# Allegro board powerSupply_design.brd
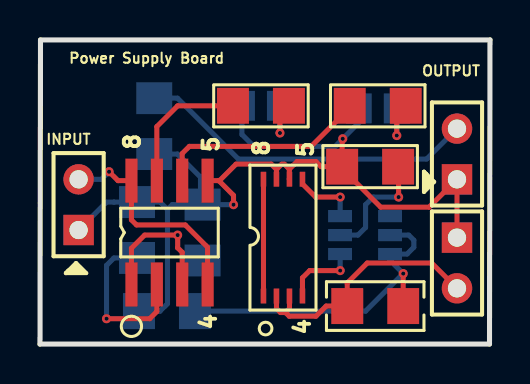
[diagram p0: board, top side]
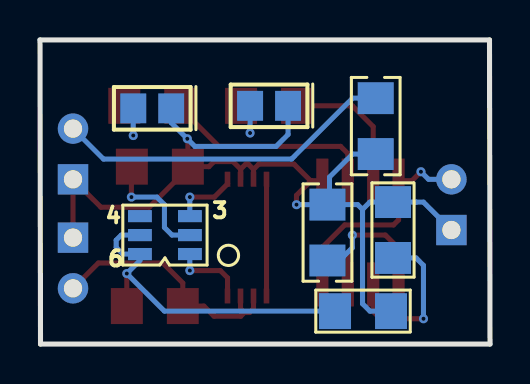
[diagram p1: board, bottom side, seen from below]

Outline 22.5 x 15.24 mm; copper layers: TOP, BOTTOM. Coordinates in mm from the lower left corner of the outline.
Outline path: 0,0 22.48,0 22.5,15.24 0.03,15.24 0,0

## Placement (name value [footprint] x y rotation side)
C1  10u  [C1206]  5.71 10.92 90 bottom
C2  0.1u  [C1206]  16.76 1.91 180 top
C3  0.1u  [C1206]  8.13 5.59 270 bottom
D1  RED  [LED0805]  16.89 11.81 180 bottom
D2  GRN  [LED0805]  11.05 11.94 180 bottom
J1  HEADER 1  [BERG1X2]  1.93 5.71 90 top
J2  HEADER 2  [BERG1X2]  20.85 5.33 270 top
J3  HEADER 3  [BERG1X2]  20.85 8.25 90 top
R1  1K  [R1206]  11.05 11.94 0 top
R2  1K  [R1206]  16.89 11.94 0 top
R3  1.2K  [R1206]  4.85 5.71 270 bottom
R5  100  [R1206]  6.35 1.65 0 bottom
R6  1K  [R1206]  16.51 8.89 0 top
U1  FS8205A  [FB8205]  12.19 5.46 90 top
U2  DW01A  [SOT23-6]  16.26 5.46 0 bottom
U3  TP4056  [SOIC-8P]  6.48 5.59 90 top

## Library data of the parts
C1-C3 = CAP NP
D1 D2 = LED
J1-J3 = HEADER 2: User Part Number: ***
R1-R3 R5 R6 = R: User Part Number: ***
U1 = FS8205A
U2 = SOT23
U3 = TP4056

## Footprints (pads in the part's own frame, mm; a bottom-side part is the same pattern mirrored in y, then rotated)
BERG1X2
  rect 1.524x1.524 hole 0.914: 1(0,0)
  round 1.524 hole 0.914: 2(2.54,0)
C1206
  rect 1.6x1.803 smd: 1(-1.4,0) 2(1.4,0)
FB8205
  rect 0.75x0.28 smd: 1(-3.052,1.016) 2(-3.052,0.366) 3(-3.052,-0.284) 4(-3.052,-0.934) 5(2.798,-0.934) 6(2.798,-0.284) 7(2.798,0.366) 8(2.798,1.016)
LED0805
  rect 1.301x1.501 smd: 1(-0.95,0) 2(0.95,0)
R1206
  rect 1.6x1.8 smd: 1(-1.4,0) 2(1.4,0)
SOIC-8P
  rect 2.21x0.61 smd: 1(-2.601,1.905) 2(-2.601,0.635) 3(-2.601,-0.635) 4(-2.601,-1.905) 5(2.601,-1.905) 6(2.601,-0.635) 7(2.601,0.635) 8(2.601,1.905)
SOT23-6
  rect 1.194x0.61 smd: 1(-1.25,0.95) 2(-1.25,0) 3(-1.25,-0.95) 4(1.25,-0.95) 5(1.25,0) 6(1.25,0.95)

## Nets
B +: C1.1 C3.1 D1.2(ANODE) D2.2(ANODE) J1.1 J2.1 J3.1 R3.1 R5.1 R6.1 U1.6(S20) U1.7(S21) U3.5(BAT)
B -: C2.2 J2.2 U1.2(S10) U1.3(S11)
IN +: J1.2 U3.4(VCC) U3.8(CE)
OUT -: C1.2 J3.2
N01452: D2.1(CATHODE) R1.2
N02103: C3.2 U3.1(TEND) U3.3(GND)
N02255: R3.2 U3.2(PROG)
N02544: R6.2 U2.2(CS)
N10932: C2.1 R5.2 U2.5(VCC) U2.6(GND)
N13434: U1.5(G11) U2.3(OC)
N14688: R1.1 U3.7(CHRG)
N14700: R2.1 U3.6(STDBY)
N15696: U1.1(D120) U1.8(D121)
N15769: U1.4(G10) U2.1(OD)
N17832: D1.1(CATHODE) R2.2

Pads without a net: U2 4

## Via types
v1: diameter 0.457, hole 0.203, TOP to BOTTOM, 11 vias

## Routing (per net, layer and track width the routed paths; a pad name or vN(x,y) marks a point on that pad's centre or on a via; arc(x,y) is an arc through that point)
B +: length 49.5
  TOP w0.254: R6.1 15.11,8.79 17.04,6.86 19.46,6.86 J3.1 J2.1 ; R6.1 15.11,10.26 v1(15.14,10.29) ; R6.1 14.06,8.89 13.8,9.14 12.85,9.14 12.47,8.76 ; U1.7 11.83,8.75 ; 11.83,8.75 12.09,9.01 12.22,9.01 12.47,8.76 ; 11.83,8.75 11.56,9.02 9.8,9.02 8.98,8.19 8.94,8.19 ; U1.6 12.47,8.26 12.47,8.76 ; v1(9.68,6.98) 9.68,7.45 8.94,8.19 ; 8.94,8.19 U3.5
  BOTTOM w0.254: C1.1 6.87,9.52 8.03,8.37 8.03,6.99 ; 6.38,6.75 6.62,6.99 8.03,6.99 ; 6.38,6.75 6.38,2.02 6,1.65 R5.1 ; 6.38,6.75 6.01,7.12 R3.1 3.7,7.12 3.69,7.11 3.33,7.11 J1.1 ; v1(9.68,6.98) 8.13,6.98 C3.1 8.03,6.99 ; D2.2 10.1,10.5 10.69,9.91 14.76,9.91 v1(15.14,10.29) 15.94,11.09 D1.2
B -: length 13
  TOP w0.254: 12.28,1.58 12.02,1.58 11.83,1.78 U1.2 ; 12.28,1.58 12.46,1.4 13.8,1.4 14.31,1.91 C2.2 15.36,3.06 16.37,4.06 19.58,4.06 J2.2 ; 12.28,1.58 12.48,1.78 U1.3
IN +: length 11.2
  TOP w0.254: U3.4 8.38,4.85 7.26,5.97 4.83,5.97 4.57,6.22 U3.8 3.9,8.19 v1(3.45,8.64)
  BOTTOM w0.254: J1.2 3.07,8.25 v1(3.45,8.64)
OUT -: length 17
  BOTTOM w0.254: 20.85,10.8 19.33,9.27 9.92,9.27 6.87,12.32 C1.2
N01452: length 2.9
  TOP w0.254: R1.2 12,11.49 v1(12,10.58)
  BOTTOM w0.254: D2.1 v1(12,10.58)
N02103: length 9.1
  TOP w0.254: U3.1 4.57,4.8 5.23,5.46 v1(6.88,5.46) 6.88,4.83 7.11,4.6 U3.3
  BOTTOM w0.254: C3.2 7.52,4.19 6.88,4.83 v1(6.88,5.46)
N02255: length 8.4
  TOP w0.254: U3.2 5.84,1.63 5.48,1.27 v1(3.33,1.27)
  BOTTOM w0.254: v1(3.33,1.27) 3.33,3.95 3.7,4.31 R3.2
N02544: length 5.9
  TOP w0.254: v1(17.93,7.37) 17.93,8.87 R6.2
  BOTTOM w0.254: U2.2 15.9,5.46 16.28,5.84 16.28,6.98 16.66,7.37 v1(17.93,7.37)
N10932: length 17.1
  TOP w0.254: C2.1 v1(18.16,3.53)
  BOTTOM w0.254: U2.5 18.44,5.46 18.69,5.21 18.69,4.85 18.36,4.51 U2.6 17.51,4.19 v1(18.16,3.53) 16.28,1.65 R5.2
N13434: length 3.4
  TOP w0.254: v1(15.01,7.37) 13.78,7.37 13.13,8.02 U1.5
  BOTTOM w0.254: v1(15.01,7.37) 15.01,6.42 U2.3
N14688: length 6.9
  TOP w0.254: U3.7 5.84,10.9 6.88,11.94 R1.1
N14700: length 10.8
  TOP w0.254: R2.1 15.49,11.84 13.56,9.91 7.47,9.91 7.11,9.55 U3.6
N15696: length 5.9
  TOP w0.254: U1.8 U1.1
N15769: length 3.8
  TOP w0.254: v1(15.01,3.68) 13.49,3.68 13.13,3.32 U1.4
  BOTTOM w0.254: U2.1 15.01,4.51 v1(15.01,3.68)
N17832: length 3
  TOP w0.254: R2.2 17.84,11.49 v1(17.84,10.45)
  BOTTOM w0.254: D1.1 v1(17.84,10.45)

## Text on the board
BOTTOM: L2 BOTTOM
Ref Des/Assembly Bottom: ASSEMBLY BOTTOM
Package Geometry/Pastemask Bottom: SOLDER PASTE BOTTOM
Ref Des/Silkscreen Bottom: SILKSCREEN BOTTOM
User.Comments: SOLDER MASK BOTTOM | SOLDER MASK TOP | 13, REFER TSLK/FAB ART FILE FOR PANEL WORK | 10, THE FABRICATOR'S UL-796 APPROVAL LOGO, LOT CODE, AND | 11, ALL DIMENSIONS APPLY AFTER PLATING AND MASKING | 12, DESIGN FEATURES: | NOTES:UNLESS OTHERWISE SPECIFIED | 1, THIS DRAWING TO BE USED IN CONJUNCTION | 2, THIS PRINTED WIRING BOARD SHALL MEET | 3, MATERIAL - EPOXY GLASS LAMINATE NATURAL | 4, THE DIAMETER DIMENSION OF ALL PLATED THRU HOLES | 5, REGISTRATION TOLERANCE: | 6, FINISH: (HASL) | 7, LIQUID PHOTOIMAGEABLE SOLDERMASK, GREEN IN | 8, SILKSCREEN USING WHITE NON CONDUCTIVE EPOXY BASED INK. | 9, PWB MUST BE 100% ELECTRICALLY TESTED FOR | COLOR, NEMA GRADE FR-4, TYPE GFN,MINIMUM | TG =135 DEGREE C.PER IPC-4101/24;UL RATED 94V-0. | COPPER FOIL TO BE IN ACCORDANCE WITH IPC-MF-150 | SHORTS AND CONTINUTY | THE LETTERS 94 V-0 SHALL BE MARKED ON SOLDER SIDE IN | COPPER ETCHED RELIEF. | MINIMUM CONDUCTOR WIDTH 10 MILS | MINIMUM SPACING 10 MILS | MINIMUM PAD/DRILL SIZES- 24 / 12 MILS | WITH THE GERBER PROVIDED AND DRILL | DATA WHERE APPLICABLE | PERFOMANCE REQUIREMENTS OF IPC-6012, | CLASS II. | APPLY AFTER FINISH | ARTWORK +/- 0.002". | ALL HOLE CENTERS +/- 0.005" FROM TRUE POSITION | COLOR, OVER BARE COPPER (SMOBC) FABRICATION | PROCESS IS TO BE USED AS PER IPC-SM-840 | THERE SHALL BE NO SILKSCREEN ON ANY SOLDERABLE AREA
TOP: L1 TOP
Ref Des/Assembly Top: Power supply board | ASSEMBLY TOP
Package Geometry/Pastemask Top: SOLDER PASTE TOP
Ref Des/Silkscreen Top: INPUT | Power Supply Board | OUTPUT | SILKSCREEN TOP
User.7: FAB DRAWING
User.11: FIGURE | SIZE | 12.0 | 20.0 | 26.0 | 28.0 | 45.0 | 51.0 | 78.74 | DRILL CHART: TOP to BOTTOM | ALL UNITS ARE IN MILS | PLATED | NON-PLATED | QTY | 64 | 10 | 6 | 4 | 2 | 12
